# EAGLE board atmega32u4-breakout-v1-panelized (EAGLE 5.10)
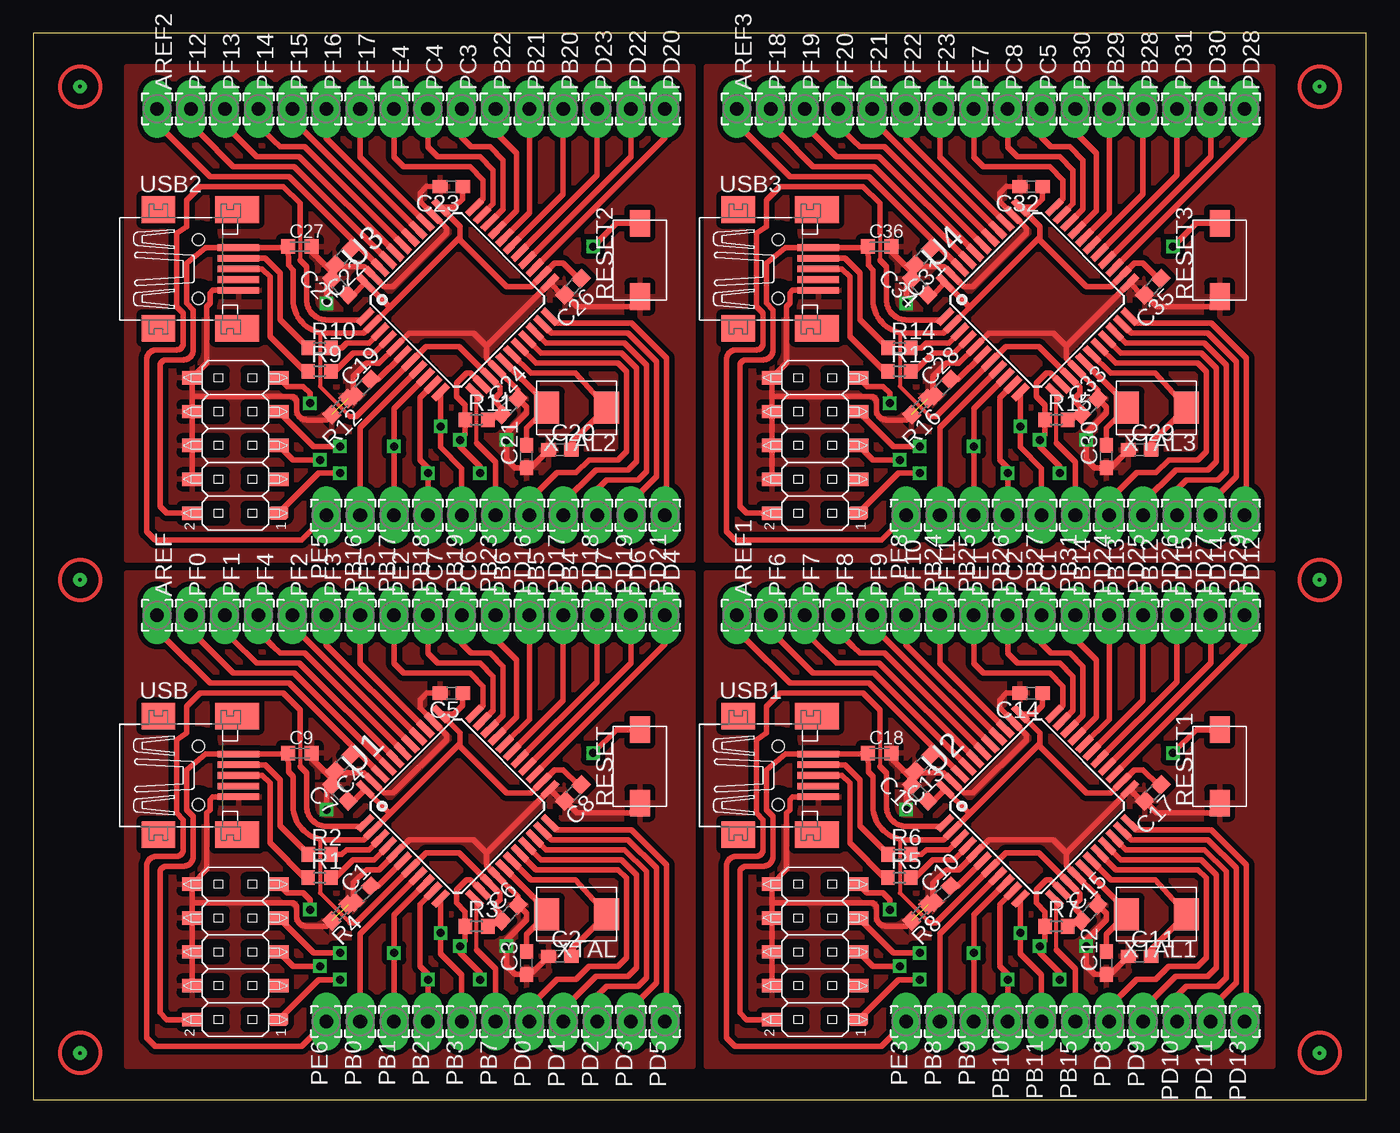
[diagram p0: board, top side]
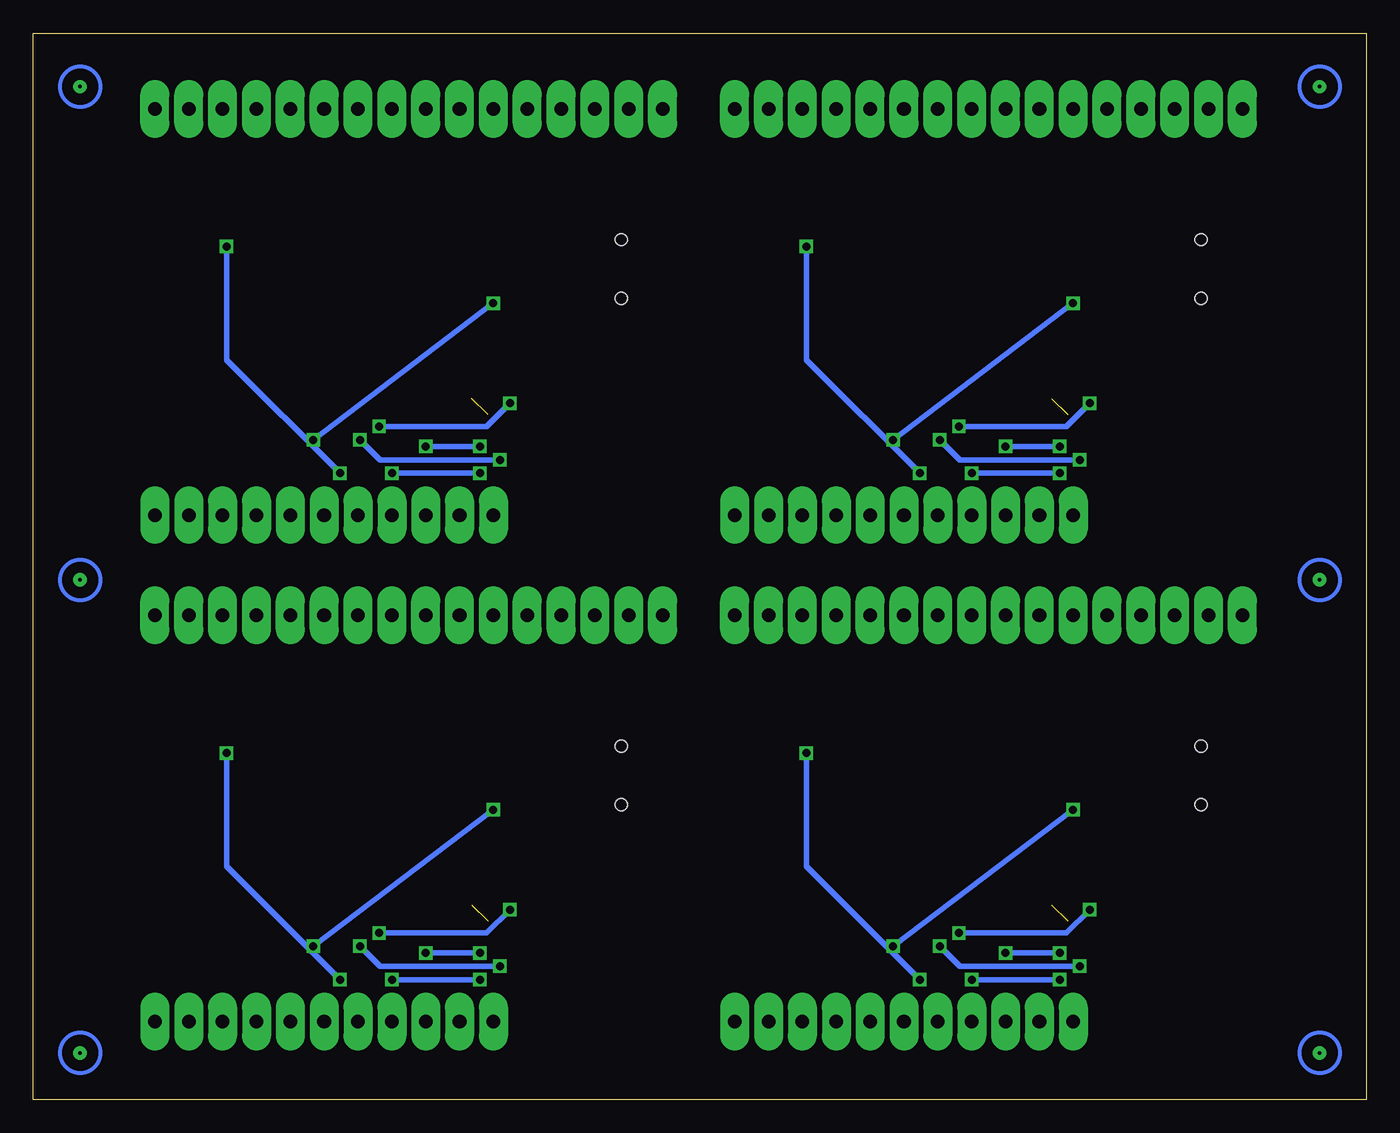
[diagram p1: board, bottom side, seen from below]

Size 100 x 80 mm. Coordinates in mm from the lower left corner, seen from the top.
Outline: 0,0 100,0 100,80 0,80 0,0
Copper layers (1*16): Top 0.035mm / dielectric 1.5mm / Bottom 0.035mm
Design rules "default *": minimum track width 10mil, minimum drill 24mil, track to track 8mil, track to pad 8mil, pad to pad 8mil, via to via 8mil, smd to smd 8mil, copper to edge 40mil, drill to drill 8mil, minimum pad ring 10mil, minimum via ring 8mil, stop-mask expansion 4mil, vias tented up to drill 0mil, thermal gap 16mil

## Footprints (pad centres in the part's own frame; a part is rotated, then mirrored left to right if it is on the bottom)
2,15Y/1,0 = drill 1.016 pad 2.159 long: 1 0,0
C0603 = smd 1.1 x 1: 1 -0.85,0; 2 0.85,0
C0603K = smd 1.05 x 1.08: 1 -0.875,0; 2 0.875,0
MARKER = drill 0.254 pad 1 round: P$1 0,0
R0603 = smd 1 x 1.1: 1 -0.85,0; 2 0.85,0
SWSMD4X6 = smd 2 x 1.5: P$1 -2.75,0; P$2 2.75,0
2X5SMD = smd 1 x 1.5: 1 -5.08,-3.25; 2 -5.08,3.25; 3 -2.54,-3.25; 4 -2.54,3.25; 5 0,-3.25; 6 0,3.25; 7 2.54,-3.25; 8 2.54,3.25; 9 5.08,-3.25; 10 5.08,3.25
TQFP44 = smd 1.5 x 0.5: 1 -5.8,4; 2 -5.8,3.2; 3 -5.8,2.4; 4 -5.8,1.6; 5 -5.8,0.8; 6 -5.8,0; 7 -5.8,-0.8; 8 -5.8,-1.6; 9 -5.8,-2.4; 10 -5.8,-3.2; 11 -5.8,-4; 23 5.8,-4; 24 5.8,-3.2; 25 5.8,-2.4; 26 5.8,-1.6; 27 5.8,-0.8; 28 5.8,0; 29 5.8,0.8; 30 5.8,1.6; 31 5.8,2.4; 32 5.8,3.2; 33 5.8,4 | smd 0.5 x 1.5: 12 -4,-5.8; 13 -3.2,-5.8; 14 -2.4,-5.8; 15 -1.6,-5.8; 16 -0.8,-5.8; 17 0,-5.8; 18 0.8,-5.8; 19 1.6,-5.8; 20 2.4,-5.8; 21 3.2,-5.8; 22 4,-5.8; 34 4,5.8; 35 3.2,5.8; 36 2.4,5.8; 37 1.6,5.8; 38 0.8,5.8; 39 0,5.8; 40 -0.8,5.8; 41 -1.6,5.8; 42 -2.4,5.8; 43 -3.2,5.8; 44 -4,5.8
32005-301 = smd 3.1 x 0.5: 1 3,1.6; 2 3,0.8; 3 3,0; 4 3,-0.8; 5 3,-1.6 | smd 2.5 x 2: M1 -3,-4.45; M2 -3,4.45 | smd 3.3 x 2: M3 2.9,4.45; M4 2.9,-4.45 | drill 0.127 pad 0.508 round: P$1 0,2.21; P$2 0,-2.21 | hole 0.9: 0,2.2; 0,-2.2
CS10 = smd 1.9 x 2.4: P$1 -2.25,0; P$2 2.25,0

## Placement (x,y rotation side)
AREF  WIREPAD2,15Y/1,0  [2,15Y/1,0]  9.28,36.33 90 top
AREF1  WIREPAD2,15Y/1,0  [2,15Y/1,0]  52.78,36.33 90 top
AREF2  WIREPAD2,15Y/1,0  [2,15Y/1,0]  9.28,74.33 90 top
AREF3  WIREPAD2,15Y/1,0  [2,15Y/1,0]  52.78,74.33 90 top
C1  1u  [C0603]  24.71,15.41 45 top
C2  18p  [C0603]  39.5,10.75 0 top
C3  18p  [C0603]  37,10.25 90 top
C4  100n  [C0603]  23.25,25.25 225 top
C5  100n  [C0603]  31.37,30.5 180 top
C6  100n  [C0603]  35.75,14 45 top
C7  100n  [C0603]  23,23 135 top
C8  100n  [C0603]  40.5,23 225 top
C9  1u  [C0603K]  20,26 0 top
C10  1u  [C0603]  68.21,15.41 45 top
C11  18p  [C0603]  83,10.75 0 top
C12  18p  [C0603]  80.5,10.25 90 top
C13  100n  [C0603]  66.75,25.25 225 top
C14  100n  [C0603]  74.87,30.5 180 top
C15  100n  [C0603]  79.25,14 45 top
C16  100n  [C0603]  66.5,23 135 top
C17  100n  [C0603]  84,23 225 top
C18  1u  [C0603K]  63.5,26 0 top
C19  1u  [C0603]  24.71,53.41 45 top
C20  18p  [C0603]  39.5,48.75 0 top
C21  18p  [C0603]  37,48.25 90 top
C22  100n  [C0603]  23.25,63.25 225 top
C23  100n  [C0603]  31.37,68.5 180 top
C24  100n  [C0603]  35.75,52 45 top
C25  100n  [C0603]  23,61 135 top
C26  100n  [C0603]  40.5,61 225 top
C27  1u  [C0603K]  20,64 0 top
C28  1u  [C0603]  68.21,53.41 45 top
C29  18p  [C0603]  83,48.75 0 top
C30  18p  [C0603]  80.5,48.25 90 top
C31  100n  [C0603]  66.75,63.25 225 top
C32  100n  [C0603]  74.87,68.5 180 top
C33  100n  [C0603]  79.25,52 45 top
C34  100n  [C0603]  66.5,61 135 top
C35  100n  [C0603]  84,61 225 top
C36  1u  [C0603K]  63.5,64 0 top
E$1  [MARKER]  3.5,3.5 0 top
E$2  [MARKER]  3.5,39 0 top
E$3  [MARKER]  3.5,76 0 top
E$4  [MARKER]  96.5,3.5 0 top
E$5  [MARKER]  96.5,39 0 top
E$7  [MARKER]  96.5,76 0 top
PB0  WIREPAD2,15Y/1,0  [2,15Y/1,0]  24.52,5.85 270 top
PB1  WIREPAD2,15Y/1,0  [2,15Y/1,0]  27.06,5.85 270 top
PB2  WIREPAD2,15Y/1,0  [2,15Y/1,0]  29.6,5.85 270 top
PB3  WIREPAD2,15Y/1,0  [2,15Y/1,0]  32.14,5.85 270 top
PB4  WIREPAD2,15Y/1,0  [2,15Y/1,0]  39.76,36.33 90 top
PB5  WIREPAD2,15Y/1,0  [2,15Y/1,0]  37.22,36.33 90 top
PB6  WIREPAD2,15Y/1,0  [2,15Y/1,0]  34.68,36.33 90 top
PB7  WIREPAD2,15Y/1,0  [2,15Y/1,0]  34.68,5.85 270 top
PB8  WIREPAD2,15Y/1,0  [2,15Y/1,0]  68.02,5.85 270 top
PB9  WIREPAD2,15Y/1,0  [2,15Y/1,0]  70.56,5.85 270 top
PB10  WIREPAD2,15Y/1,0  [2,15Y/1,0]  73.1,5.85 270 top
PB11  WIREPAD2,15Y/1,0  [2,15Y/1,0]  75.64,5.85 270 top
PB12  WIREPAD2,15Y/1,0  [2,15Y/1,0]  83.26,36.33 90 top
PB13  WIREPAD2,15Y/1,0  [2,15Y/1,0]  80.72,36.33 90 top
PB14  WIREPAD2,15Y/1,0  [2,15Y/1,0]  78.18,36.33 90 top
PB15  WIREPAD2,15Y/1,0  [2,15Y/1,0]  78.18,5.85 270 top
PB16  WIREPAD2,15Y/1,0  [2,15Y/1,0]  24.52,43.85 270 top
PB17  WIREPAD2,15Y/1,0  [2,15Y/1,0]  27.06,43.85 270 top
PB18  WIREPAD2,15Y/1,0  [2,15Y/1,0]  29.6,43.85 270 top
PB19  WIREPAD2,15Y/1,0  [2,15Y/1,0]  32.14,43.85 270 top
PB20  WIREPAD2,15Y/1,0  [2,15Y/1,0]  39.76,74.33 90 top
PB21  WIREPAD2,15Y/1,0  [2,15Y/1,0]  37.22,74.33 90 top
PB22  WIREPAD2,15Y/1,0  [2,15Y/1,0]  34.68,74.33 90 top
PB23  WIREPAD2,15Y/1,0  [2,15Y/1,0]  34.68,43.85 270 top
PB24  WIREPAD2,15Y/1,0  [2,15Y/1,0]  68.02,43.85 270 top
PB25  WIREPAD2,15Y/1,0  [2,15Y/1,0]  70.56,43.85 270 top
PB26  WIREPAD2,15Y/1,0  [2,15Y/1,0]  73.1,43.85 270 top
PB27  WIREPAD2,15Y/1,0  [2,15Y/1,0]  75.64,43.85 270 top
PB28  WIREPAD2,15Y/1,0  [2,15Y/1,0]  83.26,74.33 90 top
PB29  WIREPAD2,15Y/1,0  [2,15Y/1,0]  80.72,74.33 90 top
PB30  WIREPAD2,15Y/1,0  [2,15Y/1,0]  78.18,74.33 90 top
PB31  WIREPAD2,15Y/1,0  [2,15Y/1,0]  78.18,43.85 270 top
PC1  WIREPAD2,15Y/1,0  [2,15Y/1,0]  75.64,36.33 90 top
PC2  WIREPAD2,15Y/1,0  [2,15Y/1,0]  73.1,36.33 90 top
PC3  WIREPAD2,15Y/1,0  [2,15Y/1,0]  32.14,74.33 90 top
PC4  WIREPAD2,15Y/1,0  [2,15Y/1,0]  29.6,74.33 90 top
PC5  WIREPAD2,15Y/1,0  [2,15Y/1,0]  75.64,74.33 90 top
PC6  WIREPAD2,15Y/1,0  [2,15Y/1,0]  32.14,36.33 90 top
PC7  WIREPAD2,15Y/1,0  [2,15Y/1,0]  29.6,36.33 90 top
PC8  WIREPAD2,15Y/1,0  [2,15Y/1,0]  73.1,74.33 90 top
PD0  WIREPAD2,15Y/1,0  [2,15Y/1,0]  37.22,5.85 270 top
PD1  WIREPAD2,15Y/1,0  [2,15Y/1,0]  39.76,5.85 270 top
PD2  WIREPAD2,15Y/1,0  [2,15Y/1,0]  42.3,5.85 270 top
PD3  WIREPAD2,15Y/1,0  [2,15Y/1,0]  44.84,5.85 270 top
PD4  WIREPAD2,15Y/1,0  [2,15Y/1,0]  47.38,36.33 90 top
PD5  WIREPAD2,15Y/1,0  [2,15Y/1,0]  47.38,5.85 270 top
PD6  WIREPAD2,15Y/1,0  [2,15Y/1,0]  44.84,36.33 90 top
PD7  WIREPAD2,15Y/1,0  [2,15Y/1,0]  42.3,36.33 90 top
PD8  WIREPAD2,15Y/1,0  [2,15Y/1,0]  80.72,5.85 270 top
PD9  WIREPAD2,15Y/1,0  [2,15Y/1,0]  83.26,5.85 270 top
PD10  WIREPAD2,15Y/1,0  [2,15Y/1,0]  85.8,5.85 270 top
PD11  WIREPAD2,15Y/1,0  [2,15Y/1,0]  88.34,5.85 270 top
PD12  WIREPAD2,15Y/1,0  [2,15Y/1,0]  90.88,36.33 90 top
PD13  WIREPAD2,15Y/1,0  [2,15Y/1,0]  90.88,5.85 270 top
PD14  WIREPAD2,15Y/1,0  [2,15Y/1,0]  88.34,36.33 90 top
PD15  WIREPAD2,15Y/1,0  [2,15Y/1,0]  85.8,36.33 90 top
PD16  WIREPAD2,15Y/1,0  [2,15Y/1,0]  37.22,43.85 270 top
PD17  WIREPAD2,15Y/1,0  [2,15Y/1,0]  39.76,43.85 270 top
PD18  WIREPAD2,15Y/1,0  [2,15Y/1,0]  42.3,43.85 270 top
PD19  WIREPAD2,15Y/1,0  [2,15Y/1,0]  44.84,43.85 270 top
PD20  WIREPAD2,15Y/1,0  [2,15Y/1,0]  47.38,74.33 90 top
PD21  WIREPAD2,15Y/1,0  [2,15Y/1,0]  47.38,43.85 270 top
PD22  WIREPAD2,15Y/1,0  [2,15Y/1,0]  44.84,74.33 90 top
PD23  WIREPAD2,15Y/1,0  [2,15Y/1,0]  42.3,74.33 90 top
PD24  WIREPAD2,15Y/1,0  [2,15Y/1,0]  80.72,43.85 270 top
PD25  WIREPAD2,15Y/1,0  [2,15Y/1,0]  83.26,43.85 270 top
PD26  WIREPAD2,15Y/1,0  [2,15Y/1,0]  85.8,43.85 270 top
PD27  WIREPAD2,15Y/1,0  [2,15Y/1,0]  88.34,43.85 270 top
PD28  WIREPAD2,15Y/1,0  [2,15Y/1,0]  90.88,74.33 90 top
PD29  WIREPAD2,15Y/1,0  [2,15Y/1,0]  90.88,43.85 270 top
PD30  WIREPAD2,15Y/1,0  [2,15Y/1,0]  88.34,74.33 90 top
PD31  WIREPAD2,15Y/1,0  [2,15Y/1,0]  85.8,74.33 90 top
PE1  WIREPAD2,15Y/1,0  [2,15Y/1,0]  70.56,36.33 90 top
PE2  WIREPAD2,15Y/1,0  [2,15Y/1,0]  27.06,36.33 90 top
PE3  WIREPAD2,15Y/1,0  [2,15Y/1,0]  65.48,5.85 270 top
PE4  WIREPAD2,15Y/1,0  [2,15Y/1,0]  27.06,74.33 90 top
PE5  WIREPAD2,15Y/1,0  [2,15Y/1,0]  21.98,43.85 270 top
PE6  WIREPAD2,15Y/1,0  [2,15Y/1,0]  21.98,5.85 270 top
PE7  WIREPAD2,15Y/1,0  [2,15Y/1,0]  70.56,74.33 90 top
PE8  WIREPAD2,15Y/1,0  [2,15Y/1,0]  65.48,43.85 270 top
PF0  WIREPAD2,15Y/1,0  [2,15Y/1,0]  11.82,36.33 90 top
PF1  WIREPAD2,15Y/1,0  [2,15Y/1,0]  14.36,36.33 90 top
PF2  WIREPAD2,15Y/1,0  [2,15Y/1,0]  19.44,36.33 90 top
PF3  WIREPAD2,15Y/1,0  [2,15Y/1,0]  21.98,36.33 90 top
PF4  WIREPAD2,15Y/1,0  [2,15Y/1,0]  16.9,36.33 90 top
PF5  WIREPAD2,15Y/1,0  [2,15Y/1,0]  24.52,36.33 90 top
PF6  WIREPAD2,15Y/1,0  [2,15Y/1,0]  55.32,36.33 90 top
PF7  WIREPAD2,15Y/1,0  [2,15Y/1,0]  57.86,36.33 90 top
PF8  WIREPAD2,15Y/1,0  [2,15Y/1,0]  60.4,36.33 90 top
PF9  WIREPAD2,15Y/1,0  [2,15Y/1,0]  62.94,36.33 90 top
PF10  WIREPAD2,15Y/1,0  [2,15Y/1,0]  65.48,36.33 90 top
PF11  WIREPAD2,15Y/1,0  [2,15Y/1,0]  68.02,36.33 90 top
PF12  WIREPAD2,15Y/1,0  [2,15Y/1,0]  11.82,74.33 90 top
PF13  WIREPAD2,15Y/1,0  [2,15Y/1,0]  14.36,74.33 90 top
PF14  WIREPAD2,15Y/1,0  [2,15Y/1,0]  16.9,74.33 90 top
PF15  WIREPAD2,15Y/1,0  [2,15Y/1,0]  19.44,74.33 90 top
PF16  WIREPAD2,15Y/1,0  [2,15Y/1,0]  21.98,74.33 90 top
PF17  WIREPAD2,15Y/1,0  [2,15Y/1,0]  24.52,74.33 90 top
PF18  WIREPAD2,15Y/1,0  [2,15Y/1,0]  55.32,74.33 90 top
PF19  WIREPAD2,15Y/1,0  [2,15Y/1,0]  57.86,74.33 90 top
PF20  WIREPAD2,15Y/1,0  [2,15Y/1,0]  60.4,74.33 90 top
PF21  WIREPAD2,15Y/1,0  [2,15Y/1,0]  62.94,74.33 90 top
PF22  WIREPAD2,15Y/1,0  [2,15Y/1,0]  65.48,74.33 90 top
PF23  WIREPAD2,15Y/1,0  [2,15Y/1,0]  68.02,74.33 90 top
R1  22  [R0603]  21.47,16.64 0 top
R2  22  [R0603]  21.49,18.39 0 top
R3  10k  [R0603]  33.25,13 0 top
R4  0  [R0603]  23,14 225 top
R5  22  [R0603]  64.97,16.64 0 top
R6  22  [R0603]  64.99,18.39 0 top
R7  10k  [R0603]  76.75,13 0 top
R8  0  [R0603]  66.5,14 225 top
R9  22  [R0603]  21.47,54.64 0 top
R10  22  [R0603]  21.49,56.39 0 top
R11  10k  [R0603]  33.25,51 0 top
R12  0  [R0603]  23,52 225 top
R13  22  [R0603]  64.97,54.64 0 top
R14  22  [R0603]  64.99,56.39 0 top
R15  10k  [R0603]  76.75,51 0 top
R16  0  [R0603]  66.5,52 225 top
RESET  SMDSWITCH4X6  [SWSMD4X6]  45.5,25 90 top
RESET1  SMDSWITCH4X6  [SWSMD4X6]  89,25 90 top
RESET2  SMDSWITCH4X6  [SWSMD4X6]  45.5,63 90 top
RESET3  SMDSWITCH4X6  [SWSMD4X6]  89,63 90 top
SV1  [2X5SMD]  15.15,11.08 90 top
SV2  [2X5SMD]  58.65,11.08 90 top
SV3  [2X5SMD]  15.15,49.08 90 top
SV4  [2X5SMD]  58.65,49.08 90 top
U1  ATMEGA32U4  [TQFP44]  31.83,22.01 45 top
U2  ATMEGA32U4  [TQFP44]  75.33,22.01 45 top
U3  ATMEGA32U4  [TQFP44]  31.83,60.01 45 top
U4  ATMEGA32U4  [TQFP44]  75.33,60.01 45 top
USB  MINI-USB-32005-301  [32005-301]  12.39,24.32 0 top
USB1  MINI-USB-32005-301  [32005-301]  55.89,24.32 0 top
USB2  MINI-USB-32005-301  [32005-301]  12.39,62.32 0 top
USB3  MINI-USB-32005-301  [32005-301]  55.89,62.32 0 top
XTAL  16MHz  [CS10]  40.76,13.91 180 top
XTAL1  16MHz  [CS10]  84.26,13.91 180 top
XTAL2  16MHz  [CS10]  40.76,51.91 180 top
XTAL3  16MHz  [CS10]  84.26,51.91 180 top

## Library data of the parts
AREF AREF1-AREF3 E$1-E$5 E$7 PB0 PB1-PB31 PC1-PC8 PD0 PD1-PD31 PE1-PE8 PF0 PF1-PF23 RESET RESET1-RESET3 U1-U4 USB USB1-USB3 XTAL XTAL1-XTAL3 = jocki
C1-C36 R1-R16 = rcl
SV1-SV4 = atmel-1

## Nets
!RESET: R3.1 RESET.P$2 SV1.5 U1.13
!RESET1: R7.1 RESET1.P$2 SV2.5 U2.13
!RESET2: R11.1 RESET2.P$2 SV3.5 U3.13
!RESET3: R15.1 RESET3.P$2 SV4.5 U4.13
AREF: AREF.1 C4.1 U1.42
AREF1: AREF1.1 C13.1 U2.42
AREF2: AREF2.1 C22.1 U3.42
AREF3: AREF3.1 C31.1 U4.42
GND: C1.1 C2.1 C3.1 C4.2 C5.2 C6.2 C7.2 C8.2 C9.2 R4.1 R4.2 RESET.P$1 SV1.4 SV1.6 SV1.8 SV1.10 U1.5 U1.15 U1.23 U1.35 U1.43 USB.5
GND1: C10.1 C11.1 C12.1 C13.2 C14.2 C15.2 C16.2 C17.2 C18.2 R8.1 R8.2 RESET1.P$1 SV2.4 SV2.6 SV2.8 SV2.10 U2.5 U2.15 U2.23 U2.35 U2.43 USB1.5
GND2: C19.1 C20.1 C21.1 C22.2 C23.2 C24.2 C25.2 C26.2 C27.2 R12.1 R12.2 RESET2.P$1 SV3.4 SV3.6 SV3.8 SV3.10 U3.5 U3.15 U3.23 U3.35 U3.43 USB2.5
GND3: C28.1 C29.1 C30.1 C31.2 C32.2 C33.2 C34.2 C35.2 C36.2 R16.1 R16.2 RESET3.P$1 SV4.4 SV4.6 SV4.8 SV4.10 U4.5 U4.15 U4.23 U4.35 U4.43 USB3.5
ISPLED: SV1.3
ISPLED1: SV2.3
ISPLED2: SV3.3
ISPLED3: SV4.3
MISO: PB3.1 SV1.9 U1.11
MISO1: PB11.1 SV2.9 U2.11
MISO2: PB19.1 SV3.9 U3.11
MISO3: PB27.1 SV4.9 U4.11
MOSI: PB2.1 SV1.1 U1.10
MOSI1: PB10.1 SV2.1 U2.10
MOSI2: PB18.1 SV3.1 U3.10
MOSI3: PB26.1 SV4.1 U4.10
N$1: R1.1 USB.3
N$2: R2.1 USB.2
N$3: PB0.1 U1.8
N$4: C10.2 U2.6
N$5: C2.2 U1.17 XTAL.P$1
N$6: C3.2 U1.16 XTAL.P$2
N$7: C1.2 U1.6
N$8: R5.2 U2.4
N$9: R1.2 U1.4
N$10: R2.2 U1.3
N$11: R6.2 U2.3
N$12: R5.1 USB1.3
N$13: PB4.1 U1.28
N$14: PB5.1 U1.29
N$15: PF0.1 U1.41
N$16: PF1.1 U1.40
N$17: PF4.1 U1.39
N$18: PF2.1 U1.38
N$19: PF3.1 U1.37
N$20: PF5.1 U1.36
N$21: PE2.1 U1.33
N$22: PE6.1 U1.1
N$23: PC6.1 U1.31
N$24: PC7.1 U1.32
N$25: PB6.1 U1.30
N$26: PB7.1 U1.12
N$27: PD0.1 U1.18
N$28: PD1.1 U1.19
N$29: PD2.1 U1.20
N$30: PD3.1 U1.21
N$31: PD4.1 U1.25
N$32: PD5.1 U1.22
N$33: PD6.1 U1.26
N$34: PD7.1 U1.27
N$35: R6.1 USB1.2
N$36: C11.2 U2.17 XTAL1.P$1
N$37: C12.2 U2.16 XTAL1.P$2
N$38: PF6.1 U2.41
N$39: PF7.1 U2.40
N$40: PF8.1 U2.39
N$41: PF9.1 U2.38
N$42: PF10.1 U2.37
N$43: PF11.1 U2.36
N$44: PE1.1 U2.33
N$45: PE3.1 U2.1
N$46: PC1.1 U2.31
N$47: PC2.1 U2.32
N$48: PB8.1 U2.8
N$49: PB12.1 U2.28
N$50: PB13.1 U2.29
N$51: PB14.1 U2.30
N$52: PB15.1 U2.12
N$53: PD8.1 U2.18
N$54: PD9.1 U2.19
N$55: PD10.1 U2.20
N$56: PD11.1 U2.21
N$57: PD12.1 U2.25
N$58: PD13.1 U2.22
N$59: PD14.1 U2.26
N$60: PD15.1 U2.27
N$61: C19.2 U3.6
N$62: R9.2 U3.4
N$63: R10.2 U3.3
N$64: R9.1 USB2.3
N$65: R10.1 USB2.2
N$66: C20.2 U3.17 XTAL2.P$1
N$67: C21.2 U3.16 XTAL2.P$2
N$68: PF12.1 U3.41
N$69: PF13.1 U3.40
N$70: PF14.1 U3.39
N$71: PF15.1 U3.38
N$72: PF16.1 U3.37
N$73: PF17.1 U3.36
N$74: PE4.1 U3.33
N$75: PE5.1 U3.1
N$76: PC3.1 U3.31
N$77: PC4.1 U3.32
N$78: PB16.1 U3.8
N$79: PB20.1 U3.28
N$80: PB21.1 U3.29
N$81: PB22.1 U3.30
N$82: PB23.1 U3.12
N$83: PD16.1 U3.18
N$84: PD17.1 U3.19
N$85: PD18.1 U3.20
N$86: PD19.1 U3.21
N$87: PD20.1 U3.25
N$88: PD21.1 U3.22
N$89: PD22.1 U3.26
N$90: PD23.1 U3.27
N$91: C28.2 U4.6
N$92: R13.2 U4.4
N$93: R14.2 U4.3
N$94: R13.1 USB3.3
N$95: R14.1 USB3.2
N$96: C29.2 U4.17 XTAL3.P$1
N$97: C30.2 U4.16 XTAL3.P$2
N$98: PF18.1 U4.41
N$99: PF19.1 U4.40
N$100: PF20.1 U4.39
N$101: PF21.1 U4.38
N$102: PF22.1 U4.37
N$103: PF23.1 U4.36
N$104: PE7.1 U4.33
N$105: PE8.1 U4.1
N$106: PC5.1 U4.31
N$107: PC8.1 U4.32
N$108: PB24.1 U4.8
N$109: PB28.1 U4.28
N$110: PB29.1 U4.29
N$111: PB30.1 U4.30
N$112: PB31.1 U4.12
N$113: PD24.1 U4.18
N$114: PD25.1 U4.19
N$115: PD26.1 U4.20
N$116: PD27.1 U4.21
N$117: PD28.1 U4.25
N$118: PD29.1 U4.22
N$119: PD30.1 U4.26
N$120: PD31.1 U4.27
SCK: PB1.1 SV1.7 U1.9
SCK1: PB9.1 SV2.7 U2.9
SCK2: PB17.1 SV3.7 U3.9
SCK3: PB25.1 SV4.7 U4.9
VCC: C5.1 C6.1 C7.1 C8.1 C9.1 R3.2 SV1.2 U1.2 U1.7 U1.14 U1.24 U1.34 U1.44 USB.1
VCC1: C14.1 C15.1 C16.1 C17.1 C18.1 R7.2 SV2.2 U2.2 U2.7 U2.14 U2.24 U2.34 U2.44 USB1.1
VCC2: C23.1 C24.1 C25.1 C26.1 C27.1 R11.2 SV3.2 U3.2 U3.7 U3.14 U3.24 U3.34 U3.44 USB2.1
VCC3: C32.1 C33.1 C34.1 C35.1 C36.1 R15.2 SV4.2 U4.2 U4.7 U4.14 U4.24 U4.34 U4.44 USB3.1

## Tracks (layer width: path | path; a pad name or v marks a point on that pad's centre or on a via)
!RESET  (via drill 0.6)
  Top 0.406: U1.13 32.81,16.5 32.5,16.5 31.75,15.75 31.75,14.75 32.4,14.1 R3.1 32.4,11.9 v32,11.5 32,11 33.5,9.5 v33.5,9 | SV1.5 19.48,10 v21.5,10 | v42,26 43.75,27.75 RESET.P$2
  Bottom 0.406: v21.5,10 30.5,10 v32,11.5 | v42,26 42,17.5 v33.5,9
!RESET1  (via drill 0.6)
  Top 0.406: U2.13 76.31,16.5 76,16.5 75.25,15.75 75.25,14.75 75.9,14.1 R7.1 75.9,11.9 v75.5,11.5 75.5,11 77,9.5 v77,9 | SV2.5 62.98,10 v65,10 | v85.5,26 87.25,27.75 RESET1.P$2
  Bottom 0.406: v65,10 74,10 v75.5,11.5 | v85.5,26 85.5,17.5 v77,9
!RESET2  (via drill 0.6)
  Top 0.406: U3.13 32.81,54.5 32.5,54.5 31.75,53.75 31.75,52.75 32.4,52.1 R11.1 32.4,49.9 v32,49.5 32,49 33.5,47.5 v33.5,47 | SV3.5 19.48,48 v21.5,48 | v42,64 43.75,65.75 RESET2.P$2
  Bottom 0.406: v21.5,48 30.5,48 v32,49.5 | v42,64 42,55.5 v33.5,47
!RESET3  (via drill 0.6)
  Top 0.406: U4.13 76.31,54.5 76,54.5 75.25,53.75 75.25,52.75 75.9,52.1 R15.1 75.9,49.9 v75.5,49.5 75.5,49 77,47.5 v77,47 | SV4.5 62.98,48 v65,48 | v85.5,64 87.25,65.75 RESET3.P$2
  Bottom 0.406: v65,48 74,48 v75.5,49.5 | v85.5,64 85.5,55.5 v77,47
AREF
  Top 0.406: AREF.1 9.28,35.13 9.91,34.5 10,34.5 13.25,31.25 18.5,31.25 | 18.5,31.25 19,31.25 | 24.22,26.22 19.2,31.25 18.5,31.25 | 24.22,26.22 U1.42 | 24.22,26.22 C4.1
AREF1
  Top 0.406: AREF1.1 52.78,35.13 53.41,34.5 53.5,34.5 56.75,31.25 62,31.25 | 62,31.25 62.5,31.25 | 67.72,26.22 62.7,31.25 62,31.25 | 67.72,26.22 U2.42 | 67.72,26.22 C13.1
AREF2
  Top 0.406: AREF2.1 9.28,73.14 9.91,72.5 10,72.5 13.25,69.25 18.5,69.25 | 18.5,69.25 19,69.25 | 24.22,64.22 19.2,69.25 18.5,69.25 | 24.22,64.22 U3.42 | 24.22,64.22 C22.1
AREF3
  Top 0.406: AREF3.1 52.78,73.14 53.41,72.5 53.5,72.5 56.75,69.25 62,69.25 | 62,69.25 62.5,69.25 | 67.72,64.22 62.7,69.25 62,69.25 | 67.72,64.22 U4.42 | 67.72,64.22 C31.1
GND  (via drill 0.6)  (1 unrouted)
  Top 0.406: 34,18.52 34,17.58 U1.15 36.35,15.23 C6.2 37,13.95 37,13.5 35.5,12 v35.5,11.5 35.5,10.04 36.13,9.4 C3.1 37.3,9.4 C2.1 | 34,18.52 U1.23 39.64,22.4 C8.2 40.8,21.5 45,21.5 45.5,22 RESET.P$1 | 34,18.52 33.02,19.5 28.19,19.5 U1.5 25.94,17.25 25,17.25 24,16.25 24,14.92 arc90 C1.1 R4.1 | C5.2 29.51,30.51 29,30 29,29.36 U1.35 31,27.36 31,27 27,23 26.31,23 U1.43 24.81,24.5 23,24.5 | 23,24.5 22.9,24.6 C4.2 | 22.4,23.9 22.5,24 | 22.5,24 23,24.5 | 22.4,23.9 C7.2 22.5,23.7 22.5,24 | 22.4,23.9 22,23.5 v22,21.75 | USB.5 13.47,22.72 13.25,22.5 13.25,21.75 13,21.5 13,17.26 SV1.10 11.9,14.75 | 11.9,14.75 SV1.8 SV1.6 SV1.4 | C9.2 20.85,25.65 22.5,24 | 11.9,14.75 19.5,14.75 19.75,14.5 19.75,13.75 arc90 20.5,13 22,13 R4.2
  Bottom 0.406: v35.5,11.5 v22,21.75
  pour Top (isolate 0.406): 7,39.5 49.5,39.5 49.5,2.5 7,2.5
GND1  (via drill 0.6)  (1 unrouted)
  Top 0.406: 77.5,18.52 77.5,17.58 U2.15 79.85,15.23 C15.2 80.5,13.95 80.5,13.5 79,12 v79,11.5 79,10.04 79.64,9.4 C12.1 80.8,9.4 C11.1 | 77.5,18.52 U2.23 83.14,22.4 C17.2 84.3,21.5 88.5,21.5 89,22 RESET1.P$1 | 77.5,18.52 76.52,19.5 71.69,19.5 U2.5 69.44,17.25 68.5,17.25 67.5,16.25 67.5,14.92 arc90 C10.1 R8.1 | C14.2 73.01,30.51 72.5,30 72.5,29.36 U2.35 74.5,27.36 74.5,27 70.5,23 69.81,23 U2.43 68.31,24.5 66.5,24.5 | 66.5,24.5 66.4,24.6 C13.2 | 65.9,23.9 66,24 | 66,24 66.5,24.5 | 65.9,23.9 C16.2 66,23.7 66,24 | 65.9,23.9 65.5,23.5 v65.5,21.75 | USB1.5 56.97,22.72 56.75,22.5 56.75,21.75 56.5,21.5 56.5,17.26 SV2.10 55.4,14.75 | 55.4,14.75 SV2.8 SV2.6 SV2.4 | C18.2 64.35,25.65 66,24 | 55.4,14.75 63,14.75 63.25,14.5 63.25,13.75 arc90 64,13 65.5,13 R8.2
  Bottom 0.406: v79,11.5 v65.5,21.75
  pour Top (isolate 0.406): 50.5,39.5 93,39.5 93,2.5 50.5,2.5
GND2  (via drill 0.6)  (1 unrouted)
  Top 0.406: 34,56.52 34,55.58 U3.15 36.35,53.23 C24.2 37,51.95 37,51.5 35.5,50 v35.5,49.5 35.5,48.03 36.13,47.4 C21.1 37.3,47.4 C20.1 | 34,56.52 U3.23 39.64,60.4 C26.2 40.8,59.5 45,59.5 45.5,60 RESET2.P$1 | 34,56.52 33.02,57.5 28.19,57.5 U3.5 25.94,55.25 25,55.25 24,54.25 24,52.92 arc90 C19.1 R12.1 | C23.2 29.51,68.51 29,68 29,67.36 U3.35 31,65.36 31,65 27,61 26.31,61 U3.43 24.81,62.5 23,62.5 | 23,62.5 22.9,62.6 C22.2 | 22.4,61.9 22.5,62 | 22.5,62 23,62.5 | 22.4,61.9 C25.2 22.5,61.7 22.5,62 | 22.4,61.9 22,61.5 v22,59.75 | USB2.5 13.47,60.72 13.25,60.5 13.25,59.75 13,59.5 13,55.26 SV3.10 11.9,52.75 | 11.9,52.75 SV3.8 SV3.6 SV3.4 | C27.2 20.85,63.65 22.5,62 | 11.9,52.75 19.5,52.75 19.75,52.5 19.75,51.75 arc90 20.5,51 22,51 R12.2
  Bottom 0.406: v35.5,49.5 v22,59.75
  pour Top (isolate 0.406): 7,77.5 49.5,77.5 49.5,40.5 7,40.5
GND3  (via drill 0.6)  (1 unrouted)
  Top 0.406: 77.5,56.52 77.5,55.58 U4.15 79.85,53.23 C33.2 80.5,51.95 80.5,51.5 79,50 v79,49.5 79,48.03 79.64,47.4 C30.1 80.8,47.4 C29.1 | 77.5,56.52 U4.23 83.14,60.4 C35.2 84.3,59.5 88.5,59.5 89,60 RESET3.P$1 | 77.5,56.52 76.52,57.5 71.69,57.5 U4.5 69.44,55.25 68.5,55.25 67.5,54.25 67.5,52.92 arc90 C28.1 R16.1 | C32.2 73.01,68.51 72.5,68 72.5,67.36 U4.35 74.5,65.36 74.5,65 70.5,61 69.81,61 U4.43 68.31,62.5 66.5,62.5 | 66.5,62.5 66.4,62.6 C31.2 | 65.9,61.9 66,62 | 66,62 66.5,62.5 | 65.9,61.9 C34.2 66,61.7 66,62 | 65.9,61.9 65.5,61.5 v65.5,59.75 | USB3.5 56.97,60.72 56.75,60.5 56.75,59.75 56.5,59.5 56.5,55.26 SV4.10 55.4,52.75 | 55.4,52.75 SV4.8 SV4.6 SV4.4 | C36.2 64.35,63.65 66,62 | 55.4,52.75 63,52.75 63.25,52.5 63.25,51.75 arc90 64,51 65.5,51 R16.2
  Bottom 0.406: v79,49.5 v65.5,59.75
  pour Top (isolate 0.406): 50.5,77.5 93,77.5 93,40.5 50.5,40.5
MISO  (via drill 0.6)
  Top 0.406: U1.11 v30.56,12.5 30.56,10.94 32.14,9.36 PB3.1 | SV1.9 19.06,15.5 20.25,15.5 20.75,15 v20.75,14.25
  Bottom 0.406: v20.75,14.25 22.5,12.5 v30.56,12.5
MISO1  (via drill 0.6)
  Top 0.406: U2.11 v74.06,12.5 74.06,10.94 75.64,9.36 PB11.1 | SV2.9 62.56,15.5 63.75,15.5 64.25,15 v64.25,14.25
  Bottom 0.406: v64.25,14.25 66,12.5 v74.06,12.5
MISO2  (via drill 0.6)
  Top 0.406: U3.11 v30.56,50.5 30.56,48.94 32.14,47.36 PB19.1 | SV3.9 19.06,53.5 20.25,53.5 20.75,53 v20.75,52.25
  Bottom 0.406: v20.75,52.25 22.5,50.5 v30.56,50.5
MISO3  (via drill 0.6)
  Top 0.406: U4.11 v74.06,50.5 74.06,48.94 75.64,47.36 PB27.1 | SV4.9 62.56,53.5 63.75,53.5 64.25,53 v64.25,52.25
  Bottom 0.406: v64.25,52.25 66,50.5 v74.06,50.5
MOSI  (via drill 0.6)
  Top 0.406: U1.10 29,14.65 29,10 29.6,9.4 v29.6,9 PB2.1 | SV1.1 21.4,9 v23,9
  Bottom 0.406: v23,9 v29.6,9
MOSI1  (via drill 0.6)
  Top 0.406: U2.10 72.5,14.65 72.5,10 73.1,9.4 v73.1,9 PB10.1 | SV2.1 64.9,9 v66.5,9
  Bottom 0.406: v66.5,9 v73.1,9
MOSI2  (via drill 0.6)
  Top 0.406: U3.10 29,52.65 29,48 29.6,47.4 v29.6,47 PB18.1 | SV3.1 21.4,47 v23,47
  Bottom 0.406: v23,47 v29.6,47
MOSI3  (via drill 0.6)
  Top 0.406: U4.10 72.5,52.65 72.5,48 73.1,47.4 v73.1,47 PB26.1 | SV4.1 64.9,47 v66.5,47
  Bottom 0.406: v66.5,47 v73.1,47
N$1
  Top 0.406: R1.1 20.5,16.5 17.75,19.26 17.75,23 17.75,23.75 17.18,24.32 USB.3
N$2
  Top 0.406: R2.1 18.5,20.53 18.5,24 17.38,25.12 USB.2
N$3
  Top 0.406: U1.8 24.52,12.44 PB0.1
N$4
  Top 0.406: U2.6 69.33,16.01 C10.2
N$5
  Top 0.406: U1.17 37.34,16.5 40,16.5 40.67,16.5 XTAL.P$1 40.35,11.25 C2.2
N$6
  Top 0.406: U1.16 38.05,14.66 XTAL.P$2 | XTAL.P$2 39.1,14.07 | C3.2 37,12.4 XTAL.P$2
N$7
  Top 0.406: U1.6 25.83,16.01 C1.2
N$8
  Top 0.406: U2.4 69.06,18 67.5,18 66.14,16.64 R5.2
N$9
  Top 0.406: U1.4 25.56,18 24,18 22.64,16.64 R1.2
N$10
  Top 0.406: U1.3 25.18,18.75 23.5,18.75 23.14,18.39 R2.2
N$11
  Top 0.406: U2.3 68.68,18.75 67,18.75 66.64,18.39 R6.2
N$12
  Top 0.406: R5.1 64,16.5 61.25,19.26 61.25,23 61.25,23.75 60.68,24.32 USB1.3
N$13
  Top 0.406: U1.28 39.76,29.94 PB4.1
N$14
  Top 0.406: U1.29 37.22,28.53 PB5.1
N$15
  Top 0.406: U1.41 19.58,32 17.5,32 15,32 12.5,34.5 11.82,35.18 PF0.1
N$16
  Top 0.406: U1.40 19.96,32.75 18,32.75 16.75,32.75 15,34.5 14.36,35.14 PF1.1
N$17
  Top 0.406: U1.39 20.34,33.5 19.5,33.5 18.5,33.5 18,34 16.9,35.1 PF4.1
N$18
  Top 0.406: U1.38 19.44,35.53 PF2.1
N$19
  Top 0.406: U1.37 21.98,34.12 PF3.1
N$20
  Top 0.406: U1.36 24.52,32.71 PF5.1
N$21
  Top 0.406: U1.33 33.75,29.59 33.75,31 32.75,32 29.5,32 27.77,32 27.06,32.72 PE2.1
N$22
  Top 0.305: 20,27 20,25
  Top 0.406: U1.1 24.66,20.5 22,20.5 arc-90 20.5,22 20.5,24.5 20,25 | 20,27 20,29.25 18.75,30.5 12.5,30.5 11.5,29.5 11.5,27.5 10.75,27 10.75,21.5 11.25,21 11.25,18.75 arc-90 10.75,18.25 9.25,18.25 arc90 8.5,17.5 8.5,4.63 9.13,4 20.13,4 PE6.1
N$23
  Top 0.406: U1.31 35.25,28.82 35.25,32.5 34.25,33.5 33,33.5 32.85,33.5 32.14,34.22 PC6.1
N$24
  Top 0.406: U1.32 34.5,29.21 34.5,31.75 33.5,32.75 31,32.75 30.32,32.75 29.6,33.47 PC7.1
N$25
  Top 0.406: U1.30 36.25,28.69 36.25,33 34.68,34.57 PB6.1
N$26
  Top 0.305: 33.25,11.25 33.25,14.93
  Top 0.406: 33.25,14.93 U1.12 | 33.25,11.25 34.68,9.82 PB7.1
N$27
  Top 0.406: U1.18 37.72,17.25 42.75,17.25 43.87,17.25 44.5,16.61 44.5,16 44.5,10.63 43.87,10 41.69,10 40.72,9.04 39.28,9.04 37.75,7.5 37.22,6.97 PD0.1
N$28
  Top 0.406: U1.19 38.1,18 43,18 44.12,18 45.25,16.86 45.25,16 45.25,9.88 44.62,9.25 42.23,9.25 39.76,6.79 PD1.1
N$29
  Top 0.406: U1.20 38.48,18.75 43,18.75 44.37,18.75 46,17.11 46,16 46,9.13 45.37,8.5 43.02,8.5 42.3,7.79 PD2.1
N$30
  Top 0.406: U1.21 38.87,19.5 39,19.5 43,19.5 44.62,19.5 46.75,17.36 46.75,16 46.75,8.75 44.84,6.84 PD3.1
N$31
  Top 0.406: U1.25 47.38,34.17 PD4.1
N$32
  Top 0.406: U1.22 39,20.5 39.25,20.25 42.75,20.25 44.87,20.25 47.5,17.61 47.5,6.5 47.5,5.97 PD5.1
N$33
  Top 0.406: U1.26 44.84,32.76 PD6.1
N$34
  Top 0.406: U1.27 42.3,31.35 PD7.1
N$35
  Top 0.406: R6.1 62,20.53 62,24 60.88,25.12 USB1.2
N$36
  Top 0.406: U2.17 80.84,16.5 83.5,16.5 84.17,16.5 XTAL1.P$1 83.85,11.25 C11.2
N$37
  Top 0.406: U2.16 81.55,14.66 XTAL1.P$2 | XTAL1.P$2 82.6,14.07 | C12.2 80.5,12.4 XTAL1.P$2
N$38
  Top 0.406: U2.41 63.08,32 61,32 58.5,32 56,34.5 55.32,35.18 PF6.1
N$39
  Top 0.406: U2.40 63.46,32.75 61.5,32.75 60.25,32.75 58.5,34.5 57.86,35.14 PF7.1
N$40
  Top 0.406: U2.39 63.84,33.5 63,33.5 62,33.5 61.5,34 60.4,35.1 PF8.1
N$41
  Top 0.406: U2.38 62.94,35.53 PF9.1
N$42
  Top 0.406: U2.37 65.48,34.12 PF10.1
N$43
  Top 0.406: U2.36 68.02,32.71 PF11.1
N$44
  Top 0.406: U2.33 77.25,29.59 77.25,31 76.25,32 73,32 71.28,32 70.56,32.72 PE1.1
N$45
  Top 0.305: 63.5,27 63.5,25
  Top 0.406: U2.1 68.16,20.5 65.5,20.5 arc-90 64,22 64,24.5 63.5,25 | 63.5,27 63.5,29.25 62.25,30.5 56,30.5 55,29.5 55,27.5 54.25,27 54.25,21.5 54.75,21 54.75,18.75 arc-90 54.25,18.25 52.75,18.25 arc90 52,17.5 52,4.63 52.63,4 63.63,4 PE3.1
N$46
  Top 0.406: U2.31 78.75,28.82 78.75,32.5 77.75,33.5 76.5,33.5 76.36,33.5 75.64,34.22 PC1.1
N$47
  Top 0.406: U2.32 78,29.21 78,31.75 77,32.75 74.5,32.75 73.81,32.75 73.1,33.47 PC2.1
N$48
  Top 0.406: U2.8 68.02,12.44 PB8.1
N$49
  Top 0.406: U2.28 83.26,29.94 PB12.1
N$50
  Top 0.406: U2.29 80.72,28.53 PB13.1
N$51
  Top 0.406: U2.30 79.75,28.69 79.75,33 78.18,34.57 PB14.1
N$52
  Top 0.305: 76.75,11.25 76.75,14.93
  Top 0.406: 76.75,14.93 U2.12 | 76.75,11.25 78.18,9.82 PB15.1
N$53
  Top 0.406: U2.18 81.22,17.25 86.25,17.25 87.36,17.25 88,16.61 88,16 88,10.63 87.36,10 85.19,10 84.22,9.04 82.78,9.04 81.25,7.5 80.72,6.97 PD8.1
N$54
  Top 0.406: U2.19 81.6,18 86.5,18 87.61,18 88.75,16.86 88.75,16 88.75,9.88 88.11,9.25 85.72,9.25 83.26,6.79 PD9.1
N$55
  Top 0.406: U2.20 81.98,18.75 86.5,18.75 87.86,18.75 89.5,17.11 89.5,16 89.5,9.13 88.86,8.5 86.52,8.5 85.8,7.79 PD10.1
N$56
  Top 0.406: U2.21 82.36,19.5 82.5,19.5 86.5,19.5 88.11,19.5 90.25,17.36 90.25,16 90.25,8.75 88.34,6.84 PD11.1
N$57
  Top 0.406: U2.25 90.88,34.17 PD12.1
N$58
  Top 0.406: U2.22 82.5,20.5 82.75,20.25 86.25,20.25 88.36,20.25 91,17.61 91,6.5 91,5.97 PD13.1
N$59
  Top 0.406: U2.26 88.34,32.76 PD14.1
N$60
  Top 0.406: U2.27 85.8,31.35 PD15.1
N$61
  Top 0.406: U3.6 25.83,54.01 C19.2
N$62
  Top 0.406: U3.4 25.56,56 24,56 22.64,54.64 R9.2
N$63
  Top 0.406: U3.3 25.18,56.75 23.5,56.75 23.14,56.39 R10.2
N$64
  Top 0.406: R9.1 20.5,54.5 17.75,57.26 17.75,61 17.75,61.75 17.18,62.32 USB2.3
N$65
  Top 0.406: R10.1 18.5,58.53 18.5,62 17.38,63.12 USB2.2
N$66
  Top 0.406: U3.17 37.34,54.5 40,54.5 40.67,54.5 XTAL2.P$1 40.35,49.25 C20.2
N$67
  Top 0.406: U3.16 38.05,52.66 XTAL2.P$2 | XTAL2.P$2 39.1,52.07 | C21.2 37,50.4 XTAL2.P$2
N$68
  Top 0.406: U3.41 19.58,70 17.5,70 15,70 12.5,72.5 11.82,73.18 PF12.1
N$69
  Top 0.406: U3.40 19.96,70.75 18,70.75 16.75,70.75 15,72.5 14.36,73.14 PF13.1
N$70
  Top 0.406: U3.39 20.34,71.5 19.5,71.5 18.5,71.5 18,72 16.9,73.1 PF14.1
N$71
  Top 0.406: U3.38 19.44,73.53 PF15.1
N$72
  Top 0.406: U3.37 21.98,72.12 PF16.1
N$73
  Top 0.406: U3.36 24.52,70.71 PF17.1
N$74
  Top 0.406: U3.33 33.75,67.59 33.75,69 32.75,70 29.5,70 27.77,70 27.06,70.72 PE4.1
N$75
  Top 0.305: 20,65 20,63
  Top 0.406: U3.1 24.66,58.5 22,58.5 arc-90 20.5,60 20.5,62.5 20,63 | 20,65 20,67.25 18.75,68.5 12.5,68.5 11.5,67.5 11.5,65.5 10.75,65 10.75,59.5 11.25,59 11.25,56.75 arc-90 10.75,56.25 9.25,56.25 arc90 8.5,55.5 8.5,42.63 9.13,42 20.13,42 PE5.1
N$76
  Top 0.406: U3.31 35.25,66.82 35.25,70.5 34.25,71.5 33,71.5 32.85,71.5 32.14,72.22 PC3.1
N$77
  Top 0.406: U3.32 34.5,67.21 34.5,69.75 33.5,70.75 31,70.75 30.32,70.75 29.6,71.47 PC4.1
N$78
  Top 0.406: U3.8 24.52,50.44 PB16.1
N$79
  Top 0.406: U3.28 39.76,67.94 PB20.1
N$80
  Top 0.406: U3.29 37.22,66.53 PB21.1
N$81
  Top 0.406: U3.30 36.25,66.69 36.25,71 34.68,72.57 PB22.1
N$82
  Top 0.305: 33.25,49.25 33.25,52.93
  Top 0.406: 33.25,52.93 U3.12 | 33.25,49.25 34.68,47.82 PB23.1
N$83
  Top 0.406: U3.18 37.72,55.25 42.75,55.25 43.87,55.25 44.5,54.62 44.5,54 44.5,48.63 43.87,48 41.69,48 40.72,47.03 39.28,47.03 37.75,45.5 37.22,44.97 PD16.1
N$84
  Top 0.406: U3.19 38.1,56 43,56 44.12,56 45.25,54.87 45.25,54 45.25,47.88 44.62,47.25 42.23,47.25 39.76,44.78 PD17.1
N$85
  Top 0.406: U3.20 38.48,56.75 43,56.75 44.37,56.75 46,55.12 46,54 46,47.13 45.37,46.5 43.02,46.5 42.3,45.78 PD18.1
N$86
  Top 0.406: U3.21 38.87,57.5 39,57.5 43,57.5 44.62,57.5 46.75,55.37 46.75,54 46.75,46.75 44.84,44.84 PD19.1
N$87
  Top 0.406: U3.25 47.38,72.17 PD20.1
N$88
  Top 0.406: U3.22 39,58.5 39.25,58.25 42.75,58.25 44.87,58.25 47.5,55.62 47.5,44.5 47.5,43.97 PD21.1
N$89
  Top 0.406: U3.26 44.84,70.76 PD22.1
N$90
  Top 0.406: U3.27 42.3,69.35 PD23.1
N$91
  Top 0.406: U4.6 69.33,54.01 C28.2
N$92
  Top 0.406: U4.4 69.06,56 67.5,56 66.14,54.64 R13.2
N$93
  Top 0.406: U4.3 68.68,56.75 67,56.75 66.64,56.39 R14.2
N$94
  Top 0.406: R13.1 64,54.5 61.25,57.26 61.25,61 61.25,61.75 60.68,62.32 USB3.3
N$95
  Top 0.406: R14.1 62,58.53 62,62 60.88,63.12 USB3.2
N$96
  Top 0.406: U4.17 80.84,54.5 83.5,54.5 84.17,54.5 XTAL3.P$1 83.85,49.25 C29.2
N$97
  Top 0.406: U4.16 81.55,52.66 XTAL3.P$2 | XTAL3.P$2 82.6,52.07 | C30.2 80.5,50.4 XTAL3.P$2
N$98
  Top 0.406: U4.41 63.08,70 61,70 58.5,70 56,72.5 55.32,73.18 PF18.1
N$99
  Top 0.406: U4.40 63.46,70.75 61.5,70.75 60.25,70.75 58.5,72.5 57.86,73.14 PF19.1
N$100
  Top 0.406: U4.39 63.84,71.5 63,71.5 62,71.5 61.5,72 60.4,73.1 PF20.1
N$101
  Top 0.406: U4.38 62.94,73.53 PF21.1
N$102
  Top 0.406: U4.37 65.48,72.12 PF22.1
N$103
  Top 0.406: U4.36 68.02,70.71 PF23.1
N$104
  Top 0.406: U4.33 77.25,67.59 77.25,69 76.25,70 73,70 71.28,70 70.56,70.72 PE7.1
N$105
  Top 0.305: 63.5,65 63.5,63
  Top 0.406: U4.1 68.16,58.5 65.5,58.5 arc-90 64,60 64,62.5 63.5,63 | 63.5,65 63.5,67.25 62.25,68.5 56,68.5 55,67.5 55,65.5 54.25,65 54.25,59.5 54.75,59 54.75,56.75 arc-90 54.25,56.25 52.75,56.25 arc90 52,55.5 52,42.63 52.63,42 63.63,42 PE8.1
N$106
  Top 0.406: U4.31 78.75,66.82 78.75,70.5 77.75,71.5 76.5,71.5 76.36,71.5 75.64,72.22 PC5.1
N$107
  Top 0.406: U4.32 78,67.21 78,69.75 77,70.75 74.5,70.75 73.81,70.75 73.1,71.47 PC8.1
N$108
  Top 0.406: U4.8 68.02,50.44 PB24.1
N$109
  Top 0.406: U4.28 83.26,67.94 PB28.1
N$110
  Top 0.406: U4.29 80.72,66.53 PB29.1
N$111
  Top 0.406: U4.30 79.75,66.69 79.75,71 78.18,72.57 PB30.1
N$112
  Top 0.305: 76.75,49.25 76.75,52.93
  Top 0.406: 76.75,52.93 U4.12 | 76.75,49.25 78.18,47.82 PB31.1
N$113
  Top 0.406: U4.18 81.22,55.25 86.25,55.25 87.36,55.25 88,54.62 88,54 88,48.63 87.36,48 85.19,48 84.22,47.03 82.78,47.03 81.25,45.5 80.72,44.97 PD24.1
N$114
  Top 0.406: U4.19 81.6,56 86.5,56 87.61,56 88.75,54.87 88.75,54 88.75,47.88 88.11,47.25 85.72,47.25 83.26,44.78 PD25.1
N$115
  Top 0.406: U4.20 81.98,56.75 86.5,56.75 87.86,56.75 89.5,55.12 89.5,54 89.5,47.13 88.86,46.5 86.52,46.5 85.8,45.78 PD26.1
N$116
  Top 0.406: U4.21 82.36,57.5 82.5,57.5 86.5,57.5 88.11,57.5 90.25,55.37 90.25,54 90.25,46.75 88.34,44.84 PD27.1
N$117
  Top 0.406: U4.25 90.88,72.17 PD28.1
N$118
  Top 0.406: U4.22 82.5,58.5 82.75,58.25 86.25,58.25 88.36,58.25 91,55.62 91,44.5 91,43.97 PD29.1
N$119
  Top 0.406: U4.26 88.34,70.76 PD30.1
N$120
  Top 0.406: U4.27 85.8,69.35 PD31.1
SCK  (via drill 0.6)
  Top 0.406: U1.9 27.06,13.85 v27.06,11 PB1.1 | SV1.7 21.02,11 v23,11
  Bottom 0.406: v23,11 v27.06,11
SCK1  (via drill 0.6)
  Top 0.406: U2.9 70.56,13.85 v70.56,11 PB9.1 | SV2.7 64.52,11 v66.5,11
  Bottom 0.406: v66.5,11 v70.56,11
SCK2  (via drill 0.6)
  Top 0.406: U3.9 27.06,51.85 v27.06,49 PB17.1 | SV3.7 21.02,49 v23,49
  Bottom 0.406: v23,49 v27.06,49
SCK3  (via drill 0.6)
  Top 0.406: U4.9 70.56,51.85 v70.56,49 PB25.1 | SV4.7 64.52,49 v66.5,49
  Bottom 0.406: v66.5,49 v70.56,49
VCC
  Top 0.305: 23.75,13.25 21.5,15.5 21.5,19.5
  Top 0.406: 26.65,21.35 U1.2 24.79,19.5 22,19.5 | 26.65,21.35 32,26.71 | 32,26.71 32,27.5 U1.34 31.59,28.94 32.22,29.57 C5.1 | 32,26.71 32,26.5 35.5,23 37.35,23 U1.24 39.1,24.75 39.75,24.75 40.9,23.6 C8.1 | 26.65,21.35 26.65,21.54 U1.44 24.02,22.4 C7.1 | 23.75,13.25 24.2,13.25 U1.7 29.45,18.5 31.95,18.5 U1.14 35,15.45 35,15 34.72,14.72 34.72,14.28 35.15,13.85 C6.1 34.25,13 R3.2 | SV1.2 10,6 9.5,6.5 9.5,17 arc-90 10,17.5 11.25,17.5 arc90 12,18.25 12,21.25 11.5,21.75 11.5,24.75 12.92,25.92 USB.1 19.07,25.92 C9.1 19.15,24.6 19.5,24.25 19.5,22 arc90 22,19.5 | 22,19.5 21.5,19.5
VCC1
  Top 0.305: 67.25,13.25 65,15.5 65,19.5
  Top 0.406: 70.15,21.35 U2.2 68.29,19.5 65.5,19.5 | 70.15,21.35 75.5,26.71 | 75.5,26.71 75.5,27.5 U2.34 75.08,28.94 75.72,29.57 C14.1 | 75.5,26.71 75.5,26.5 79,23 80.85,23 U2.24 82.6,24.75 83.25,24.75 84.4,23.6 C17.1 | 70.15,21.35 70.15,21.54 U2.44 67.52,22.4 C16.1 | 67.25,13.25 67.7,13.25 U2.7 72.95,18.5 75.45,18.5 U2.14 78.5,15.45 78.5,15 78.22,14.72 78.22,14.28 78.65,13.85 C15.1 77.75,13 R7.2 | SV2.2 53.5,6 53,6.5 53,17 arc-90 53.5,17.5 54.75,17.5 arc90 55.5,18.25 55.5,21.25 55,21.75 55,24.75 56.42,25.92 USB1.1 62.57,25.92 C18.1 62.65,24.6 63,24.25 63,22 arc90 65.5,19.5 | 65.5,19.5 65,19.5
VCC2
  Top 0.305: 23.75,51.25 21.5,53.5 21.5,57.5
  Top 0.406: 26.65,59.35 U3.2 24.79,57.5 22,57.5 | 26.65,59.35 32,64.71 | 32,64.71 32,65.5 U3.34 31.59,66.94 32.22,67.58 C23.1 | 32,64.71 32,64.5 35.5,61 37.35,61 U3.24 39.1,62.75 39.75,62.75 40.9,61.6 C26.1 | 26.65,59.35 26.65,59.54 U3.44 24.02,60.4 C25.1 | 23.75,51.25 24.2,51.25 U3.7 29.45,56.5 31.95,56.5 U3.14 35,53.45 35,53 34.72,52.72 34.72,52.28 35.15,51.85 C24.1 34.25,51 R11.2 | SV3.2 10,44 9.5,44.5 9.5,55 arc-90 10,55.5 11.25,55.5 arc90 12,56.25 12,59.25 11.5,59.75 11.5,62.75 12.92,63.92 USB2.1 19.07,63.92 C27.1 19.15,62.6 19.5,62.25 19.5,60 arc90 22,57.5 | 22,57.5 21.5,57.5
VCC3
  Top 0.305: 67.25,51.25 65,53.5 65,57.5
  Top 0.406: 70.15,59.35 U4.2 68.29,57.5 65.5,57.5 | 70.15,59.35 75.5,64.71 | 75.5,64.71 75.5,65.5 U4.34 75.08,66.94 75.72,67.58 C32.1 | 75.5,64.71 75.5,64.5 79,61 80.85,61 U4.24 82.6,62.75 83.25,62.75 84.4,61.6 C35.1 | 70.15,59.35 70.15,59.54 U4.44 67.52,60.4 C34.1 | 67.25,51.25 67.7,51.25 U4.7 72.95,56.5 75.45,56.5 U4.14 78.5,53.45 78.5,53 78.22,52.72 78.22,52.28 78.65,51.85 C33.1 77.75,51 R15.2 | SV4.2 53.5,44 53,44.5 53,55 arc-90 53.5,55.5 54.75,55.5 arc90 55.5,56.25 55.5,59.25 55,59.75 55,62.75 56.42,63.92 USB3.1 62.57,63.92 C36.1 62.65,62.6 63,62.25 63,60 arc90 65.5,57.5 | 65.5,57.5 65,57.5

## Text on the board
Reference: REF | PF0 | PF1 | PF4 | PF2 | PF3 | PF5 | PE2 | PC7 | PC6 | PB6 | PB5 | PB4 | PD7 | PD6 | PD4 | REF | PF0 | PF1 | PF4 | PF2 | PF3 | PF5 | PE2 | PC7 | PC6 | PB6 | PB5 | PB4 | PD7 | PD6 | PD4 | RESET | RESET | ISP | PB | PD | ISP | PB | PD | 0 | 1 | 2 | 3 | 7 | 0 | 1 | 2 | 3 | 5 | 0 | 1 | 2 | 3 | 7 | 0 | 1 | 2 | 3 | 5 | 1 | 1 | PE6 | PE6 | REF | PF0 | PF1 | PF4 | PF2 | PF3 | PF5 | PE2 | PC7 | PC6 | PB6 | PB5 | PB4 | PD7 | PD6 | PD4 | REF | PF0 | PF1 | PF4 | PF2 | PF3 | PF5 | PE2 | PC7 | PC6 | PB6 | PB5 | PB4 | PD7 | PD6 | PD4 | RESET | RESET | ISP | PB | PD | ISP | PB | PD | 0 | 1 | 2 | 3 | 7 | 0 | 1 | 2 | 3 | 5 | 0 | 1 | 2 | 3 | 7 | 0 | 1 | 2 | 3 | 5 | 1 | 1 | PE6 | PE6